# Altium PCB Bass DebugBoard Panel.PcbDoc
Units mm, origin at the board's own origin, x right, y up, seen from the top; angles counter-clockwise.
Board outline 94.26 x 187.99 mm, 2 copper layers (Top Layer, Bottom Layer), stack 1.569 mm thick; 2 components, 0 nets, 8 pads, 0 vias.
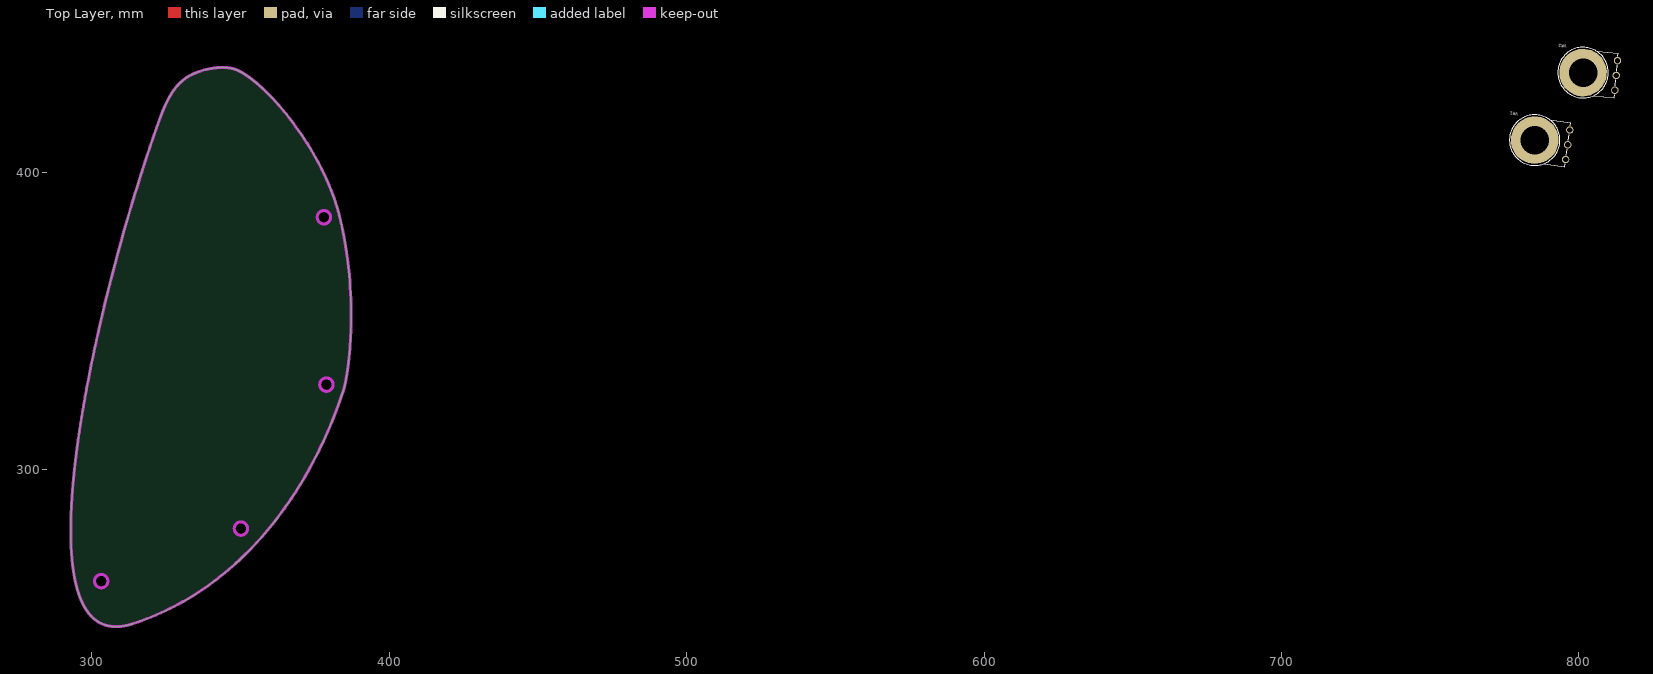
[diagram p0: Top Layer view]
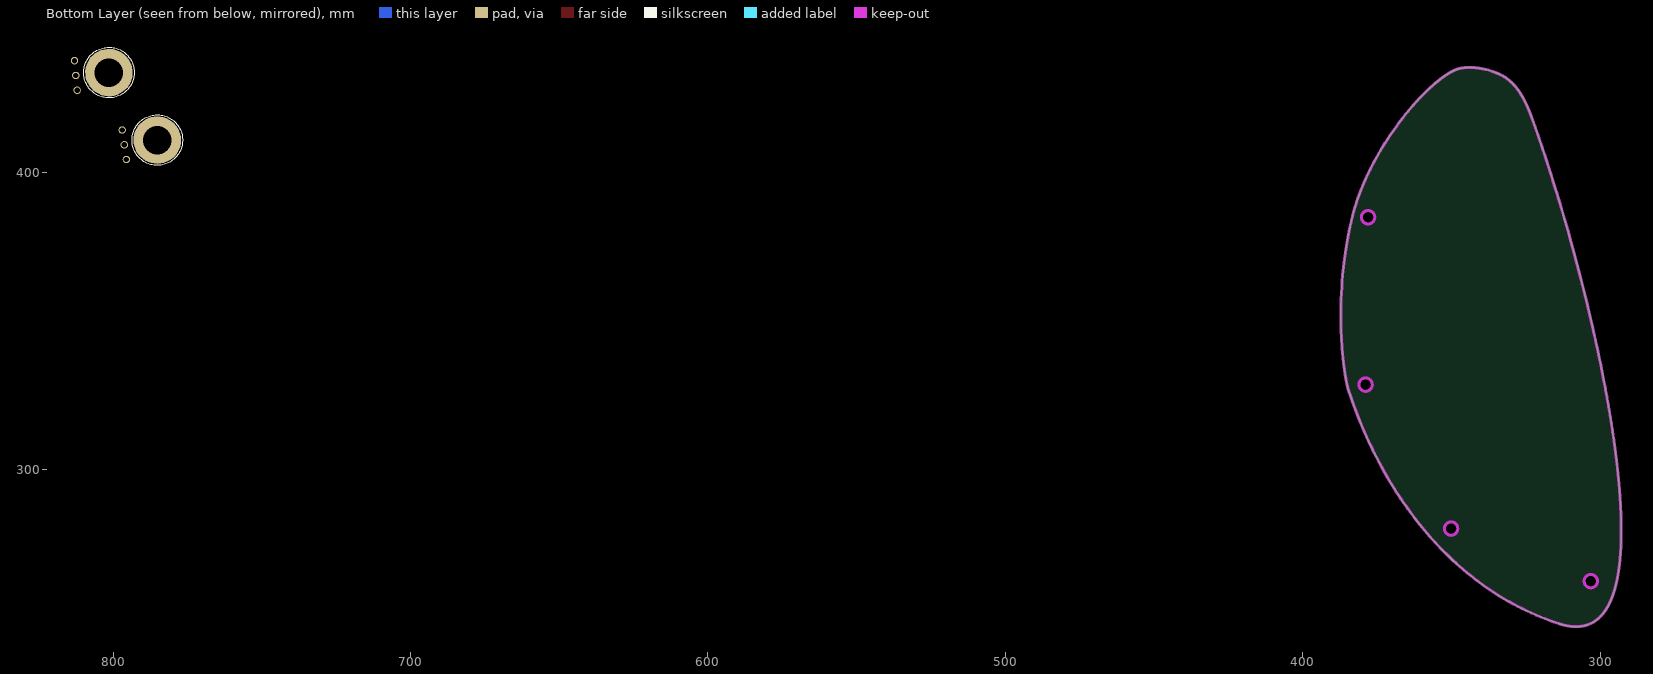
[diagram p1: Bottom Layer view, seen from below]

## Layer stack, top to bottom
Top Solder: solder mask 0.0254, SM-002, Dk 4
Top Layer: signal copper 0.035
Dielectric 1: core 1.4986, Core-043, Dk 4.3
Bottom Layer: signal copper 0.035
Bottom Solder: solder mask 0.0254, SM-002, Dk 4

## Board outline
1390 vertices, not listed, extent 292.94,247.304 387.204,435.295
cut-out: 376.111,383.801 376.043,383.925 375.983,384.053 375.931,384.184 375.887,384.319 375.852,384.456 375.826,384.594 375.808,384.735 375.799,384.876 375.799,385.017 375.808,385.158 375.826,385.298 375.852,385.437 375.887,385.574 375.931,385.709 375.983,385.84 376.043,385.968 376.111,386.092 376.187,386.211 376.27,386.325 376.36,386.434 376.457,386.537 376.56,386.634 376.669,386.724 376.783,386.807 376.903,386.883 377.026,386.951 377.154,387.011 377.286,387.063 377.42,387.107 377.557,387.142 377.696,387.169 377.836,387.186 377.977,387.195 378.119,387.195 378.26,387.186 378.4,387.169 378.539,387.142 378.676,387.107 378.81,387.063 378.942,387.011 379.069,386.951 379.193,386.883 379.313,386.807 379.427,386.724 379.536,386.634 379.639,386.537 379.736,386.434 379.826,386.325 379.909,386.211 379.985,386.092 380.053,385.968 380.113,385.84 380.165,385.709 380.209,385.574 380.244,385.437 380.27,385.298 380.288,385.158 380.297,385.017 380.297,384.876 380.288,384.735 380.27,384.594 380.244,384.456 380.209,384.319 380.165,384.184 380.113,384.053 380.053,383.925 379.985,383.801 379.909,383.682 379.826,383.567 379.736,383.458 379.639,383.355 379.536,383.259 379.427,383.169 379.313,383.085 379.193,383.01 379.069,382.942 378.942,382.881 378.81,382.829 378.676,382.786 378.539,382.751 378.4,382.724 378.26,382.706 378.119,382.698 377.977,382.698 377.836,382.706 377.696,382.724 377.557,382.751 377.42,382.786 377.286,382.829 377.154,382.881 377.026,382.942 376.903,383.01 376.783,383.085 376.669,383.169 376.56,383.259 376.457,383.355 376.36,383.458 376.27,383.567 376.187,383.682
cut-out: 377.013,327.428 376.938,327.549 376.872,327.673 376.813,327.802 376.763,327.934 376.721,328.069 376.687,328.206 376.662,328.345 376.646,328.486 376.639,328.627 376.641,328.768 376.651,328.909 376.671,329.049 376.699,329.188 376.736,329.324 376.781,329.458 376.834,329.589 376.896,329.716 376.966,329.839 377.043,329.958 377.127,330.071 377.219,330.179 377.317,330.281 377.421,330.376 377.531,330.465 377.646,330.547 377.766,330.621 377.891,330.688 378.02,330.746 378.152,330.797 378.287,330.839 378.424,330.872 378.563,330.897 378.704,330.913 378.845,330.92 378.986,330.919 379.127,330.908 379.267,330.889 379.406,330.861 379.542,330.824 379.676,330.779 379.807,330.725 379.934,330.663 380.057,330.594 380.175,330.517 380.289,330.432 380.397,330.341 380.498,330.243 380.594,330.139 380.683,330.029 380.764,329.913 380.839,329.793 380.905,329.668 380.964,329.54 381.015,329.408 381.057,329.273 381.09,329.135 381.115,328.996 381.131,328.856 381.138,328.715 381.136,328.573 381.126,328.432 381.107,328.292 381.078,328.154 381.042,328.017 380.996,327.884 380.943,327.753 380.881,327.626 380.811,327.503 380.734,327.384 380.65,327.271 380.559,327.163 380.461,327.061 380.356,326.965 380.246,326.877 380.131,326.795 380.011,326.721 379.886,326.654 379.758,326.595 379.625,326.545 379.491,326.503 379.353,326.469 379.214,326.444 379.074,326.428 378.932,326.421 378.791,326.423 378.65,326.433 378.51,326.453 378.372,326.481 378.235,326.518 378.101,326.563 377.97,326.617 377.843,326.678 377.72,326.748 377.602,326.825 377.488,326.91 377.381,327.001 377.279,327.099 377.183,327.203 377.094,327.313
cut-out: 348.265,279.03 348.191,279.151 348.124,279.275 348.066,279.404 348.015,279.536 347.973,279.671 347.939,279.808 347.915,279.947 347.899,280.088 347.891,280.229 347.893,280.37 347.904,280.511 347.923,280.651 347.951,280.79 347.988,280.926 348.033,281.06 348.087,281.191 348.149,281.318 348.218,281.441 348.295,281.559 348.38,281.673 348.471,281.781 348.569,281.883 348.673,281.978 348.783,282.067 348.899,282.149 349.019,282.223 349.143,282.29 349.272,282.348 349.404,282.399 349.539,282.441 349.676,282.474 349.815,282.499 349.956,282.515 350.097,282.522 350.238,282.521 350.379,282.51 350.519,282.491 350.658,282.463 350.794,282.426 350.928,282.38 351.059,282.327 351.186,282.265 351.309,282.196 351.428,282.118 351.541,282.034 351.649,281.943 351.751,281.845 351.846,281.74 351.935,281.63 352.017,281.515 352.091,281.395 352.158,281.27 352.216,281.142 352.267,281.01 352.309,280.875 352.342,280.737 352.367,280.598 352.383,280.458 352.391,280.317 352.389,280.175 352.378,280.034 352.359,279.894 352.331,279.756 352.294,279.619 352.249,279.485 352.195,279.355 352.133,279.227 352.064,279.104 351.987,278.986 351.902,278.873 351.811,278.765 351.713,278.663 351.609,278.567 351.499,278.479 351.383,278.397 351.263,278.323 351.139,278.256 351.01,278.197 350.878,278.147 350.743,278.105 350.606,278.071 350.466,278.046 350.326,278.03 350.185,278.023 350.044,278.025 349.903,278.035 349.763,278.055 349.624,278.083 349.488,278.12 349.354,278.165 349.223,278.219 349.096,278.28 348.973,278.35 348.854,278.427 348.741,278.511 348.633,278.603 348.531,278.701 348.436,278.805 348.347,278.915
cut-out: 301.232,261.458 301.164,261.582 301.104,261.71 301.052,261.842 301.008,261.976 300.973,262.113 300.947,262.252 300.929,262.392 300.92,262.533 300.92,262.674 300.929,262.816 300.947,262.956 300.973,263.095 301.008,263.232 301.052,263.366 301.104,263.497 301.164,263.625 301.232,263.749 301.308,263.869 301.391,263.983 301.481,264.092 301.578,264.195 301.681,264.292 301.79,264.382 301.904,264.465 302.024,264.54 302.148,264.609 302.275,264.669 302.407,264.721 302.541,264.764 302.678,264.8 302.817,264.826 302.957,264.844 303.098,264.853 303.24,264.853 303.381,264.844 303.521,264.826 303.66,264.8 303.797,264.764 303.931,264.721 304.063,264.669 304.19,264.609 304.314,264.54 304.434,264.465 304.548,264.382 304.657,264.292 304.76,264.195 304.857,264.092 304.947,263.983 305.03,263.869 305.106,263.749 305.174,263.625 305.234,263.497 305.286,263.366 305.33,263.232 305.365,263.095 305.391,262.956 305.409,262.816 305.418,262.674 305.418,262.533 305.409,262.392 305.391,262.252 305.365,262.113 305.33,261.976 305.286,261.842 305.234,261.71 305.174,261.582 305.106,261.458 305.03,261.339 304.947,261.225 304.857,261.116 304.76,261.013 304.657,260.916 304.548,260.826 304.434,260.743 304.314,260.667 304.19,260.599 304.063,260.539 303.931,260.487 303.797,260.443 303.66,260.408 303.521,260.382 303.381,260.364 303.24,260.355 303.098,260.355 302.957,260.364 302.817,260.382 302.678,260.408 302.541,260.443 302.407,260.487 302.275,260.539 302.148,260.599 302.024,260.667 301.904,260.743 301.79,260.826 301.681,260.916 301.578,261.013 301.481,261.116 301.391,261.225 301.308,261.339

## Design rules (kind name [scope] priority, off if disabled: settings)
Clearance [All] p1: gap=0.254 ignorepadtopadclearanceinfootprint=FALSE except(0: Arc-Hole Track-Hole SMDPad-Hole THPad-Hole Via-Hole Fill-Hole Poly-Hole Region-Hole Text-Hole)
PolygonConnect [All] p1: connectstyle=Relief reliefconductorwidth=0.254 reliefentries=4 polygonreliefangle="90 Angle" airgapwidth=0.254
RoutingVias [All] p1: holewidth=0.711 width=1.27 viastyle="Through Hole" minholewidth=0.711 minwidth=1.27 maxholewidth=0.711 maxwidth=1.27
SolderMaskExpansion [All] p1: expansion=0.102 istentingtop=FALSE
Width [All] p1: maxlimit=0.254 minlimit=0.254 preferedwidth=0.254
30 further rules are at their usual default settings.

## Components (designator, comment, footprint, x,y, rotation, side; value= is the part's Value field where it differs from the comment)
VR1 "Pot EB 500kC" VB16Z 785.116,410.875 r82 top
VR2 "Pot EB 500kC" VB16Z 801.36,433.587 r85 top

## Footprints (in the part's own frame and the unit in brackets; to place one, negate y for a bottom-side part, rotate by r counter-clockwise, add the part's x,y. Pads: shape width x height; smd on the part's side, far side on the other; paste and mask are expansions set on the pad)
VB16Z [mm] "pot"
  round 2.5 hole 1.8: 1(5,-11.2) 2(0,-11.2) 3(-5,-11.2)
  round 16 hole 9.6: 4(0,0)
  silkscreen extent -8.5,-11.2 8.5,8.5, body extent -8.5,-11.5 8.5,8.5, height 9.2

## Part data
VR1 VR2: library part CMP-048-0004-4, "LC001W, F grease - drawing 887-1241", Design Item ID="Pot EB 500kC", Selective Soldering=YES, Source=Schlib.SchLib, Supplied by Darkglass=YES

## Nets (pads, with @x,y where several pads share a name; then routed paths per layer and width w, separated by ;. In a path a pad name is that pad's centre, name@x,y a point inside that pad or via, vN(x,y) a via of type N, cw(c..) or ccw(c..) an arc to the next point about the centre after c; other vN are vias at no path point)
pads on no net: VR1.1 VR1.2 VR1.3 VR1.4 VR2.1 VR2.2 VR2.3 VR2.4

## Keep-outs
Keep-Out Layer:
  drawing of 1789 lines, arcs and shapes, not listed

## Silkscreen, mask and mechanical layers (free items; w line width, h text height)
Board:
  drawing of 1789 lines, arcs and shapes, not listed